# EAGLE board SWITCHBOARD2 (EAGLE 7.4.0)
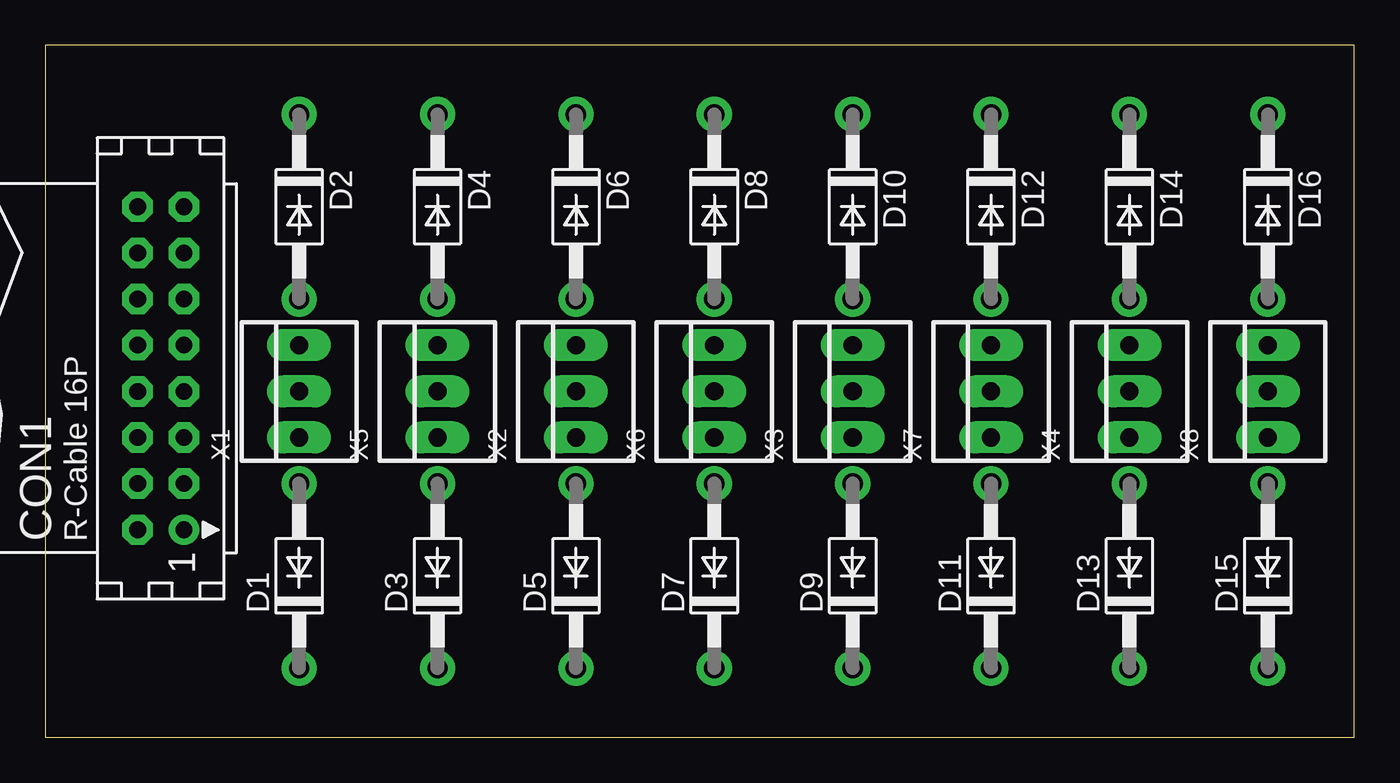
[diagram p0: board, top side]
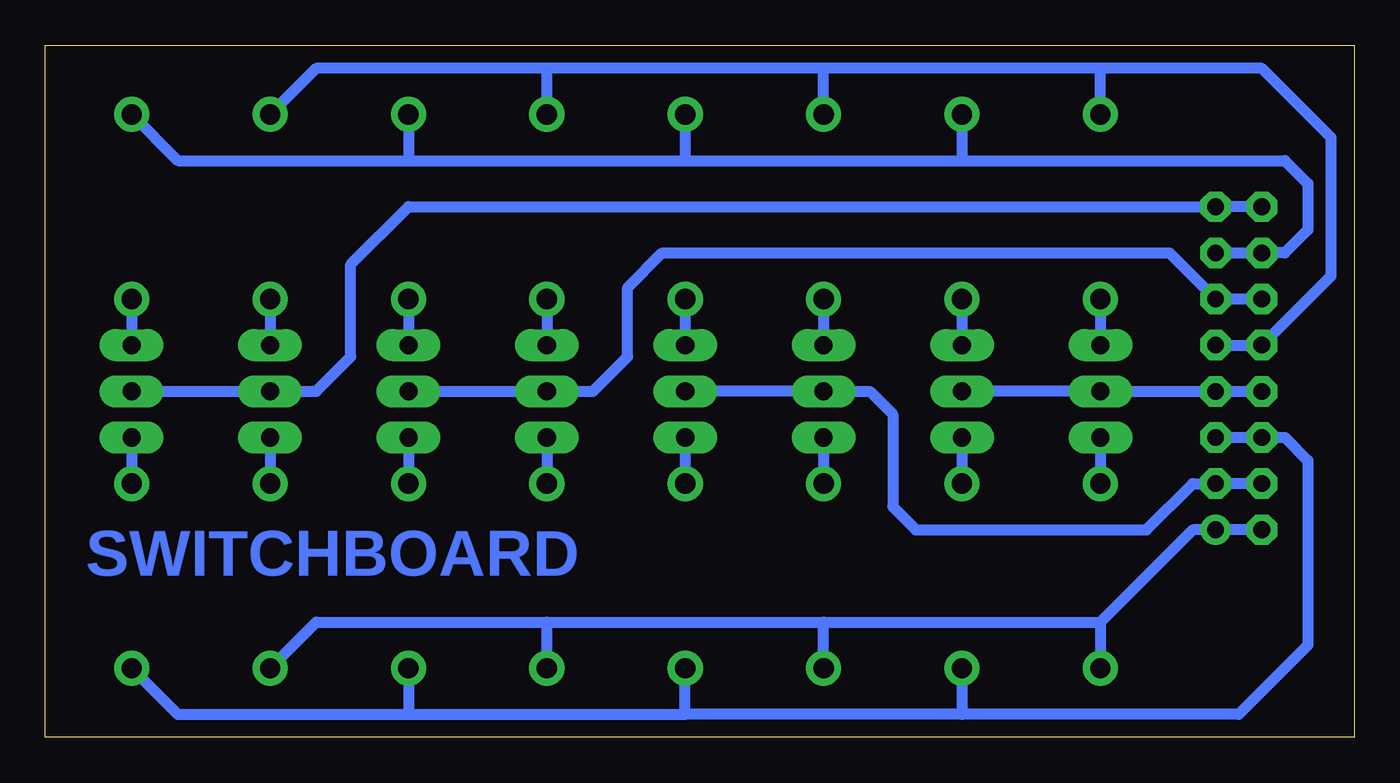
[diagram p1: board, bottom side, seen from below]

Size 72.06 x 38.09 mm. Coordinates in mm from the lower left corner, seen from the top.
Outline: 0,0 72.06,0 72.06,38.09 0,38.09 0,0
Copper layers (1*16): Top 0.035mm / dielectric 1.5mm / Bottom 0.035mm
Design rules "default *": minimum track width 15mil, minimum drill 32mil, track to track 20mil, track to pad 20mil, pad to pad 20mil, via to via 20mil, smd to smd 8mil, copper to edge 0mil, drill to drill 8mil, minimum pad ring 15mil, minimum via ring 15mil, stop-mask expansion 0mil, vias tented up to drill 0mil, thermal gap 10mil

## Footprints (pad centres in the part's own frame; a part is rotated, then mirrored left to right if it is on the bottom)
CON16 = drill 0.914: 1 -8.89,-1.27 | drill 0.914 octagon: 2 -8.89,1.27; 3 -6.35,-1.27; 4 -6.35,1.27; 5 -3.81,-1.27; 6 -3.81,1.27; 7 -1.27,-1.27; 8 -1.27,1.27; 9 1.27,-1.27; 10 1.27,1.27; 11 3.81,-1.27; 12 3.81,1.27; 13 6.35,-1.27; 14 6.35,1.27; 15 8.89,-1.27; 16 8.89,1.27
DO41-10 = drill 1.118 pad 1.93: A 5.08,0; C -5.08,0
22-23-2031 = drill 1 long: 1 -2.54,0; 2 0,0; 3 2.54,0

## Placement (x,y rotation side)
CON1  [CON16]  6.35,20.32 90 top
D1  1N4004  [DO41-10]  13.97,8.89 90 top
D2  1N4004  [DO41-10]  13.97,29.21 270 top
D3  1N4004  [DO41-10]  21.59,8.89 90 top
D4  1N4004  [DO41-10]  21.59,29.21 270 top
D5  1N4004  [DO41-10]  29.21,8.89 90 top
D6  1N4004  [DO41-10]  29.21,29.21 270 top
D7  1N4004  [DO41-10]  36.83,8.89 90 top
D8  1N4004  [DO41-10]  36.83,29.21 270 top
D9  1N4004  [DO41-10]  44.45,8.89 90 top
D10  1N4004  [DO41-10]  44.45,29.21 270 top
D11  1N4004  [DO41-10]  52.07,8.89 90 top
D12  1N4004  [DO41-10]  52.07,29.21 270 top
D13  1N4004  [DO41-10]  59.69,8.89 90 top
D14  1N4004  [DO41-10]  59.69,29.21 270 top
D15  1N4004  [DO41-10]  67.31,8.89 90 top
D16  1N4004  [DO41-10]  67.31,29.21 270 top
X1  22-23-2031  [22-23-2031]  13.97,19.05 90 top
X2  22-23-2031  [22-23-2031]  29.21,19.05 90 top
X3  22-23-2031  [22-23-2031]  44.45,19.05 90 top
X4  22-23-2031  [22-23-2031]  59.69,19.05 90 top
X5  22-23-2031  [22-23-2031]  21.59,19.05 90 top
X6  22-23-2031  [22-23-2031]  36.83,19.05 90 top
X7  22-23-2031  [22-23-2031]  52.07,19.05 90 top
X8  22-23-2031  [22-23-2031]  67.31,19.05 90 top

## Library data of the parts
CON1 = con-harting; OC_FARNELL: unknown; OC_NEWARK: unknown
D1-D16 = adafruit
X1-X8 = con-molex; MF: MOLEX; MPN: 22-23-2031; OC_FARNELL: 1462950; OC_NEWARK: 30C0862

## Nets
N$1: D1.A X1.1
N$2: D2.A X1.3
N$3: D3.A X5.1
N$4: D4.A X5.3
N$5: D5.A X2.1
N$6: D6.A X2.3
N$7: D7.A X6.1
N$8: D8.A X6.3
N$9: D9.A X3.1
N$10: D10.A X3.3
N$11: D11.A X7.1
N$12: D12.A X7.3
N$13: D13.A X4.1
N$14: D14.A X4.3
N$15: D15.A X8.1
N$16: D16.A X8.3
N$17: CON1.9 CON1.10 D2.C D6.C D10.C D14.C
N$18: CON1.1 CON1.2 D1.C D5.C D9.C D13.C
N$20: CON1.13 CON1.14 D4.C D8.C D12.C D16.C
N$21: CON1.7 CON1.8 X1.2 X5.2
N$22: CON1.3 CON1.4 X2.2 X6.2
N$23: CON1.11 CON1.12 X3.2 X7.2
N$24: CON1.15 CON1.16 X4.2 X8.2
N$26: CON1.5 CON1.6 D3.C D7.C D11.C D15.C

## Tracks (layer width: path | path; a pad name or v marks a point on that pad's centre or on a via)
N$1
  Bottom 0.61: X1.1 D1.A
N$2
  Bottom 0.61: D2.A X1.3
N$3
  Bottom 0.61: X5.1 D3.A
N$4
  Bottom 0.61: D4.A X5.3
N$5
  Bottom 0.61: X2.1 D5.A
N$6
  Bottom 0.61: D6.A X2.3
N$7
  Bottom 0.61: X6.1 D7.A
N$8
  Bottom 0.61: D8.A X6.3
N$9
  Bottom 0.61: X3.1 D9.A
N$10
  Bottom 0.61: D10.A X3.3
N$11
  Bottom 0.61: X7.1 D11.A
N$12
  Bottom 0.61: D12.A X7.3
N$13
  Bottom 0.61: X4.1 D13.A
N$14
  Bottom 0.61: D14.A X4.3
N$15
  Bottom 0.61: X8.1 D15.A
N$16
  Bottom 0.61: D16.A X8.3
N$17
  Bottom 0.61: CON1.9 CON1.10 1.27,25.4 1.27,33.02 5.08,36.83 13.97,36.83 | 13.97,36.83 29.21,36.83 | 29.21,36.83 44.45,36.83 | 44.45,36.83 57.15,36.83 D14.C | D6.C 29.21,36.83 | D2.C 13.97,36.83 | D10.C 44.45,36.83
N$18
  Bottom 0.61: CON1.2 CON1.1 8.89,11.43 13.97,6.35 | 13.97,6.35 D1.C | D5.C 29.21,6.35 | 29.21,6.35 13.97,6.35 | D9.C 44.45,6.35 | 44.45,6.35 29.21,6.35 | D13.C 57.15,6.35 44.45,6.35
N$20
  Bottom 0.61: D16.C 64.77,31.75 52.07,31.75 | 52.07,31.75 36.83,31.75 | 36.83,31.75 21.59,31.75 | 21.59,31.75 3.81,31.75 2.54,30.48 2.54,29.21 2.54,27.94 3.81,26.67 CON1.14 CON1.13 | D4.C 21.59,31.75 | D8.C 36.83,31.75 | D12.C 52.07,31.75
N$21
  Bottom 0.61: CON1.8 CON1.7 X1.2 X5.2
N$22
  Bottom 0.61: CON1.4 CON1.3 8.89,13.97 11.43,11.43 24.13,11.43 25.4,12.7 25.4,17.78 26.67,19.05 X2.2 X6.2
N$23
  Bottom 0.61: X7.2 X3.2 41.91,19.05 40.01,20.95 40.01,24.77 38.1,26.67 10.16,26.67 CON1.11 CON1.12
N$24
  Bottom 0.61: X8.2 X4.2 57.15,19.05 55.24,20.95 55.24,26.04 52.07,29.21 CON1.15 CON1.16
N$26
  Bottom 0.61: CON1.5 CON1.6 3.81,16.51 2.54,15.24 2.54,5.08 6.35,1.27 21.59,1.27 | D3.C 21.59,1.27 | 21.59,1.27 36.83,1.27 | 36.83,1.27 D7.C | D11.C 52.07,1.27 | 52.07,1.27 36.83,1.27 | D15.C 64.77,1.27 52.07,1.27

## Text on the board
Bottom: SWITCHBOARD